# Altium PCB SBM_BMS.PcbDoc (part 1 of 4)
Units mil, origin at the board's own origin, x right, y up, seen from the top; angles counter-clockwise.
Board outline 7537.59 x 2875 mil, 2 copper layers (Top Layer, Bottom Layer), stack 64.961 mil thick; 180 components, 137 nets, 631 pads, 494 vias.
Unrouted connection lines stored in the file: 10.
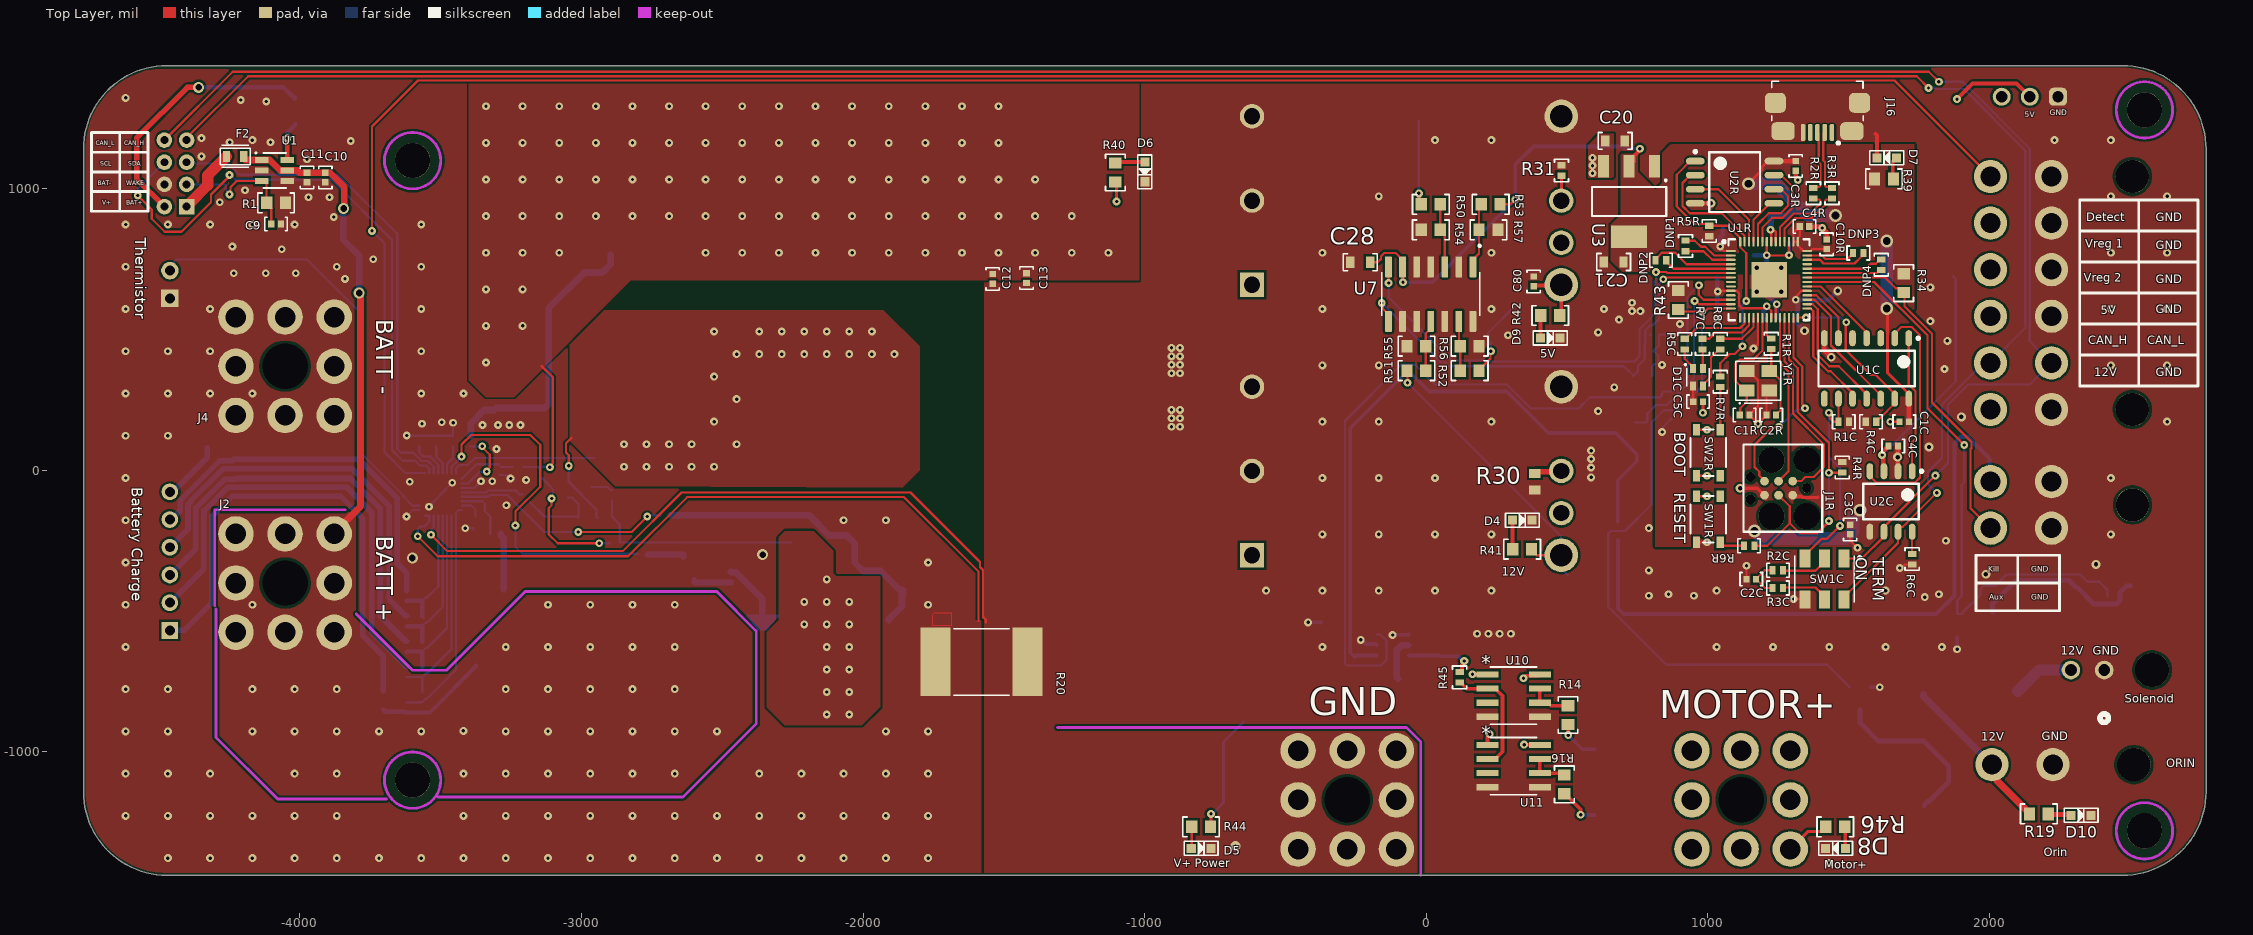
[diagram p0: Top Layer view]
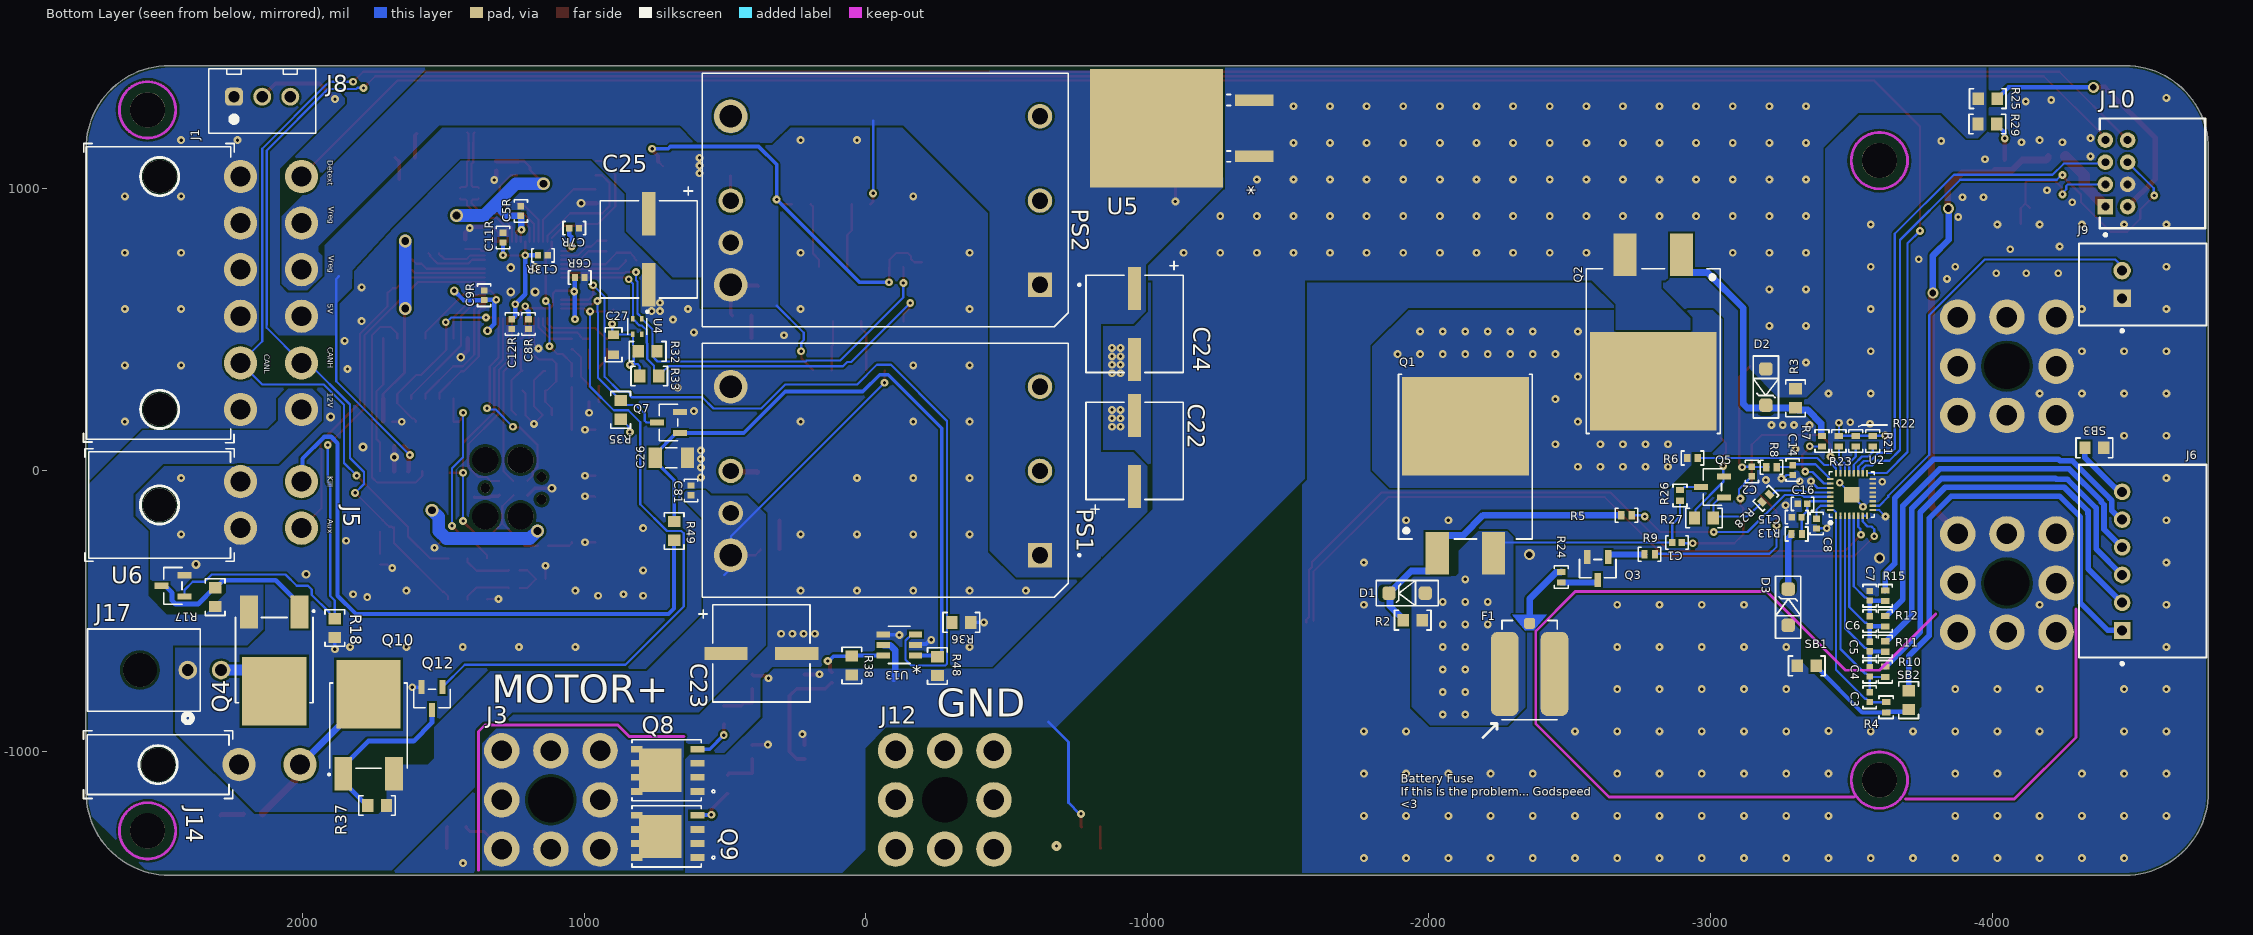
[diagram p1: Bottom Layer view, seen from below]
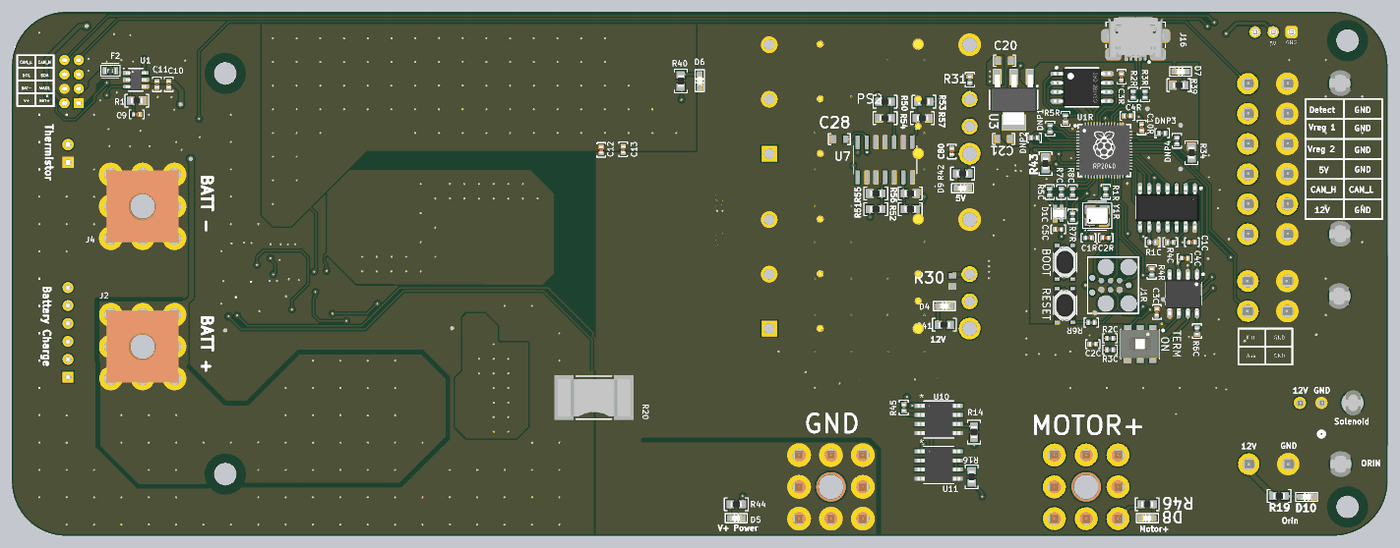
[diagram p4: 3D render of the assembled board from above, using the file's embedded part models]
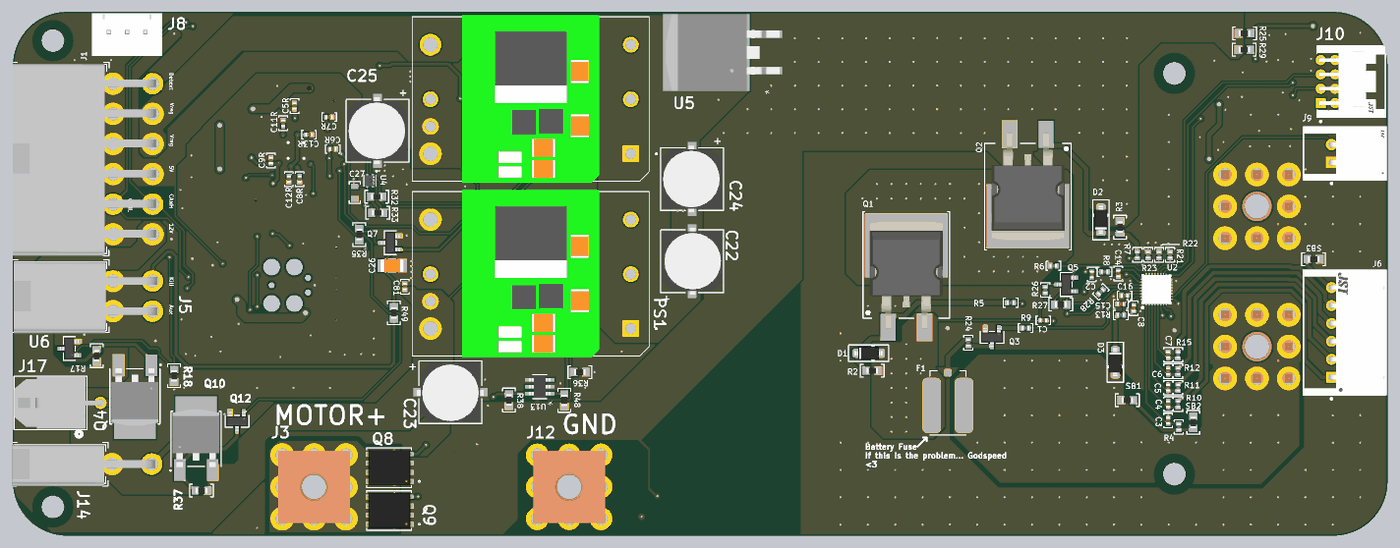
[diagram p5: 3D render of the assembled board from below, using the file's embedded part models]

## Layer stack, top to bottom
Top Solder: solder mask 0.5, Solder Resist, Dk 3.8
Top Layer: signal copper 2.9528
Dielectric: core 59.0551, FR-4, Dk 4.5
Bottom Layer: signal copper 2.9528
Bottom Solder: solder mask 0.5, Solder Resist, Dk 3.8

## Board outline
-4472.5,-1437.5 cw(c-4472.5,-1141.21) -4768.79,-1141.21 -4768.79,1141.21 cw(c-4472.51,1141.21) -4472.5,1437.5 2472.5,1437.5 cw(c2472.51,1141.2) 2768.8,1141.2 2768.8,-1141.2 cw(c2472.5,-1141.2) 2472.5,-1437.5

## Design rules (kind name [scope] priority, off if disabled: settings)
AcuteAngle [All] p1: minimum=6.00000000000000E+0001 checktracksonly=TRUE
BoardOutlineClearance "BoardOutlineClearance JLCPCB" [All] p1: gap=7.87 ignorepadtopadclearanceinfootprint=FALSE
Clearance "Clearance JLCPCB 2oz" [All] p1: gap=7.87 ignorepadtopadclearanceinfootprint=FALSE except(10: Arc-Hole Track-Hole SMDPad-Hole THPad-Hole Via-Hole Fill-Hole Poly-Hole Region-Hole Text-Hole)
DiffPairsRouting [All] p1: maxlimit=10 minlimit=6 mostfreqgap=8 toplayer_minwidth=8 toplayer_maxwidth=15 toplayer_prefwidth=8 bottomlayer_minwidth=8 bottomlayer_maxwidth=15 bottomlayer_prefwidth=8 maxuncoupledlength=500
HoleSize "HoleSize JLCPCB Pad" [IsPad] p1: absolutevalues=TRUE maxlimit=248.03 minlimit=19.68 maxpercent=80.000 minpercent=20.000
HoleSize "HoleSize JLCPCB 2 layer" [All] p2: absolutevalues=TRUE maxlimit=248.03 minlimit=11.81 maxpercent=80.000 minpercent=20.000
HoleToHoleClearance "HoleToHoleClearance JLCPCB" [All] p1: gap=10 allowstackedmicrovias=TRUE
MinimumAnnularRing "MinimumAnnularRing JLCPCB Pad" [IsPad] p1: minimumring=11.81
MinimumAnnularRing "MinimumAnnularRing JLCPCB 2oz" [All] p2: minimumring=7.87
MinimumSolderMaskSliver [All] p1: minsoldermaskwidth=1
PlaneConnect [All] p1: pad.planeconnectstyle=Relief pad.reliefexpansion=20 pad.reliefentries=4 pad.reliefconductorwidth=10 pad.reliefairgap=10 via.planeconnectstyle=Direct via.reliefexpansion=20 via.reliefentries=4 via.reliefconductorwidth=10 via.reliefairgap=10
PolygonConnect [All] p1: connectstyle=Direct reliefconductorwidth=15 reliefentries=4 polygonreliefangle="45 Angle" airgapwidth=10
RoutingVias "RoutingVias JLCPCB" [All] p1: holewidth=15.75 width=31.5 viastyle="Through Hole" minholewidth=11.81 minwidth=15.75 maxholewidth=28 maxwidth=50
SilkToSilkClearance [All] p1: silktosilkclearance=3
SilkToSolderMaskClearance "SilkToSolderMaskClearance JLCPCB" [IsPad] p1: minsilkscreentomaskgap=5.91 clearancetoexposedcopper=TRUE
SolderMaskExpansion "SolderMaskExpansion JLCPCB" [All] p1: expansion=1.97 istentingtop=FALSE
SupplyNets "Schematic Supply Nets_10" [InNet('BAT-')] p1: voltage=0.000
SupplyNets "Schematic Supply Nets_8" [InNet('BAT+')] p2: voltage=0.000
SupplyNets "Schematic Supply Nets_7" [InNet('GND_RP2CAN')] p3: voltage=0.000
SupplyNets "Schematic Supply Nets_6" [InNet('3V3_RP2CAN')] p4: voltage=0.000
SupplyNets "Schematic Supply Nets_5" [InNet('MOTOR_PWR')] p5: voltage=0.000
SupplyNets "Schematic Supply Nets_4" [InNet('V+')] p6: voltage=0.000
SupplyNets "Schematic Supply Nets_2" [InNet('Vreg')] p7: voltage=0.000
SupplyNets "Schematic Supply Nets_1" [InNet('12V')] p8: voltage=0.000
SupplyNets "Schematic Supply Nets" [InNet('5V')] p9: voltage=0.000
Width "Width JLCPCB 2oz" [All] p1: maxlimit=200 minlimit=7.87 preferedwidth=10 minimp=50.000000 maximp=50.000000 favimp=50.000000
23 further rules are at their usual default settings.

## Classes and differential pairs
differential pair class "USB 2.0": USB USB_RP2040
component class U_RP2040_with_CAN: C1C C2C C3C C4C C5C D1C R1C R2C R3C R4C R5C R6C R7C R8C SW1C U1C U2C
component class U_RP2040_C: C1R C2R C3R C4R C5R C6R C7R C8R C9R C10R C11R C12R C13R J1R R1R R2R R3R R4R R5R R6R R7R SW1R SW2R U1R U2R Y1R
component class U_PD_MK2_Power: C20 C21 C22 C23 C24 C25 C80 C81 PS1 PS2 R30 R31 U3 U5
component class U_PD_MK2_Killswitch: C26 Q7 Q8 Q9 R14 R16 R35 R36 R38 R45 R48 R49 U10 U11 U13
component class U_PD_MK2_Circuits: C27 C28 D10 DNP1 DNP2 DNP3 DNP4 Q4 Q10 Q12 R17 R18 R19 R32 R33 R34 R37 R43 R50 R51 R52 R53 R54 R55 R56 R57 U4 U6 U7
component class Poactuator_Connectors: D4 D5 D6 D7 D8 D9 J1 J3 J5 J8 J12 J14 J16 J17 R39 R40 R41 R42 R44 R46
component class BMS: C1 C2 C3 C4 C5 C6 C7 C8 C9 C10 C11 C12 C13 C14 C15 C16 D1 D2 D3 F1 F2 J2 J4 J6 J9 J10 Q1 Q2 Q3 Q5 R1 R2 R3 R4 R5 R6 R7 R8 R9 R10 R11 R12 R13 R15 R20 R21 R22 R23 R24 R25 R26 R27 R28 R29 SB1 SB2 SB3 U1 U2
differential pair USB: +USB_P -USB_N
differential pair USB_RP2040: +USB_RP2040_P -USB_RP2040_N

## Components (designator, comment, footprint, x,y, rotation, side; value= is the part's Value field where it differs from the comment)
C1 "100nF Ceramic 25V" CAPACITOR_0402 -2881.29,-256.01 r0 bottom value=0.1uF
C1C "100nF Ceramic 25V" CAPACITOR_0402 1697.13,173.03 r180 top value=0.1uF
C1R "27pF Ceramic 50V" CAPACITOR_0402 1130.2,196.65 r0 top value=27pF
C2 "100nF Ceramic 25V" CAPACITOR_0402 -3147,-4 r270 bottom value=0.1uF
C2C "4700pF Ceramic 25V" CAPACITOR_0402 1153.82,-386.02 r0 top value=4.7nF
C2R "27pF Ceramic 50V" CAPACITOR_0402 1224.69,196.65 r180 top value=27pF
C3 "100nF Ceramic 25V" CAPACITOR_0402 -3565.69,-805.33 r90 bottom value=0.1uF
C3C "100nF Ceramic 25V" CAPACITOR_0402 1505,-210 r270 top value=0.1uF
C3R "100nF Ceramic 6.3V" CAPACITOR_0402 1311.3,1081.3 r270 top value=0.1uF
C4 "100nF Ceramic 25V" CAPACITOR_0402 -3565.69,-715.33 r90 bottom value=0.1uF
C4C "100nF Ceramic 25V" CAPACITOR_0402 1657.76,86.42 r0 top value=0.1uF
C4R "1uF Ceramic 16V" CAPACITOR_0402 1342.8,865.94 r0 top value=1uF
C5 "100nF Ceramic 25V" CAPACITOR_0402 -3565.69,-625.33 r90 bottom value=0.1uF
C5C "1uF Ceramic 16V" CAPACITOR_0402 964.84,243.9 r0 top value=1uF
C5R "100nF Ceramic 6.3V" CAPACITOR_0402 1224.69,921.06 r90 bottom value=0.1uF
C6 "100nF Ceramic 25V" CAPACITOR_0402 -3565.69,-535.33 r90 bottom value=0.1uF
C6R "100nF Ceramic 6.3V" CAPACITOR_0402 1015,685 r180 bottom value=0.1uF
C7 "100nF Ceramic 25V" CAPACITOR_0402 -3565.69,-445.33 r90 bottom value=0.1uF
C7R "100nF Ceramic 6.3V" CAPACITOR_0402 1035,860 r180 bottom value=0.1uF
C8 "2.2uF Ceramic 35V" CAPACITOR_0402 -3377,-189 r90 bottom value=2.2uF
C8R "100nF Ceramic 6.3V" CAPACITOR_0402 1197.02,519.49 r270 bottom value=0.1uF
C9 "100nF Ceramic 25V" CAPACITOR_0402 -4085,875 r0 top value=0.1uF
C9R "100nF Ceramic 6.3V" CAPACITOR_0402 1354.61,621.85 r90 bottom value=0.1uF
C10 "1uF Ceramic 16V" CAPACITOR_0402 -3910,1040 r270 top value=1uF
C10R "100nF Ceramic 6.3V" CAPACITOR_0402 1421.54,802.95 r90 top value=0.1uF
C11 "100nF Ceramic 25V" CAPACITOR_0402 -3975,1040 r270 top value=0.1uF
C11R "1uF Ceramic 16V" CAPACITOR_0402 1287.68,826.57 r90 bottom value=1uF
C12 "1uF Ceramic 16V" CAPACITOR_0402 -1540,680 r270 top value=1uF
C12R "100nF Ceramic 6.3V" CAPACITOR_0402 1256.18,519.49 r270 bottom value=0.1uF
C13 "100nF Ceramic 25V" CAPACITOR_0402 -1420,682.87 r270 top value=0.1uF
C13R "100nF Ceramic 6.3V" CAPACITOR_0402 1145.94,763.58 r180 bottom value=0.1uF
C14 "1uF Ceramic 16V" CAPACITOR_0402 -3292,1 r270 bottom value=1uF
C15 "100nF Ceramic 25V" CAPACITOR_0402 -3306.29,-166.01 r180 bottom value=0.1uF
C16 "1uF Ceramic 16V" CAPACITOR_0402 -3327,-119 r180 bottom value=1uF
C20 "10uF Ceramic 6.3V" CAPACITOR_0603 670,1170 r0 top
C21 "10uF Ceramic 6.3V" CAPACITOR_0603 665,740 r180 top
C22 "100uF electrolytic 35 V" PCAP_8x5.4-ELECT_NCA -955,69 r90 bottom value=100uF
C23 "22uF electrolytic 35 V" PCAP_8x5.4-ELECT_NCA 370,-650 r180 bottom value=22uF
C24 "100uF electrolytic 35 V" PCAP_8x5.4-ELECT_NCA -955,520 r270 bottom value=100uF
C25 "22uF electrolytic 35 V" PCAP_8x5.4-ELECT_NCA 770,785 r270 bottom value=22uF
C26 "10uF Ceramic 25V" CAPACITOR_1206 690,45 r180 bottom
C27 "100nF Ceramic 6.3V" CAPACITOR_0603 895,446 r270 bottom value=0.1uF
C28 "100nF Ceramic 6.3V" CAPACITOR_0603 -235,739 r180 top value=0.1uF
C80 "CL05A104KA5NNNC" CAPACITOR_0402 381,671 r90 top
C81 "CL05A104KA5NNNC" CAPACITOR_0402 620,-71 r90 bottom
D1 "Zener_Diode_16V_500mW" SOD-123 -1923,-436 r0 bottom
D1C "EAST1616RGBB4" LED_0606_4SMD 964.84,330.51 r270 top
D2 "Zener_Diode_16V_500mW" SOD-123 -3197,296 r270 bottom
D3 "MBR0520LT3G" SOD-123 -3276.29,-486.01 r90 bottom
D4 "IN-S63AT5G" LED_0603 340.71,-177.01 r0 top
D5 "IN-S63AT5G" LED_0603 -800,-1342 r0 top
D6 "IN-S63AT5G" LED_0603 -1000,1060 r270 top
D7 "IN-S63AT5G" LED_0603 1635,1110 r180 top
D8 "IN-S63AT5G" LED_0603 1453,-1342 r180 top
D9 "IN-S63AT5G" LED_0603 440,470 r0 top
D10 "IN-S63AT5G" LED_0603 2325,-1225 r0 top
DNP1 "DNP" RESISTOR_0402 920,797 r270 top
DNP2 "DNP" RESISTOR_0402 833,746 r0 top
DNP3 "DNP" RESISTOR_0402 1534,772 r180 top
DNP4 "DNP" RESISTOR_0402 1615,730 r90 top
F1 "ITV9550L2045MR" ITV9550 -2358,-633 r270 bottom
F2 "Fuse 1A 32V 0603" "2-SMD Fuse 0603" -4230,1115 r180 top
J1 "Mini-Fit Jr R/A" "CONN_MOLEX_MINIFIT JR_12 POS_R/A" 2255,630 r270 bottom
J1R "TagConnect SWD" TC2030-MCP 1350.67,-63.19 r180 top
J2 "Redcube M4 Term 85A" "Redcube M4 Term 85A" -4053,-400 r0 top
J3 "Redcube M4 Term 85A" "Redcube M4 Term 85A" 1117.7,-1170 r180 bottom
J4 "Redcube M4 Term 85A" "Redcube M4 Term 85A" -4053,370 r0 top
J5 "Mini-Fit Jr R/A" "CONN_MOLEX_MINIFIT JR_4 POS_R/A" 2507.4,-122.68 r270 bottom
J6 "S6B-XH-A-1(LF)(SN)" FP-S6B-XH-A-1_LF_SN-MFG -4534.85,-322.21 r270 bottom
J8 "XH2.54 VERT" CONN_JST_XH254_3POS_VERT 2243,1327 r180 bottom
J9 "S2B-XH-A-1(LF)(SN)" FP-S2B-XH-A-1_LF_SN-MFG -4535,660 r270 bottom
J10 "S8B-PHDSS (LF)(SN)" FP-S8B-PHDSS_LF_SN-MFG -4570,1055 r270 bottom
J12 "Redcube M4 Term 85A" "Redcube M4 Term 85A" -281,-1170 r180 bottom
J14 "Mini-Fit Jr R/A" "CONN_MOLEX_MINIFIT JR_2 POS_R/A" 2512.4,-1045 r270 bottom locked
J16 "USB_MICRO R/A" CONN_MINIUSB 1388.82,1305.32 r180 top
J17 "Microfit R/A" "CONN_MOLEX_MICROFIT_2 POS_R/A" 2407.11,-709 r270 bottom
PS1 "I6A4W020A033V-001-R" CONV_I6A4W020A033V-001-R -70,0 r0 bottom
PS2 "I6A4W020A033V-001-R" CONV_I6A4W020A033V-001-R -70,960 r0 bottom
Q1 "MOSFET N-Ch 80V 100A D2PAK" D2PAK -2130,-69 r180 bottom
Q2 "MOSFET N-Ch 80V 100A D2PAK" D2PAK -2797,541 r0 bottom
Q3 "MOSFET N-CH 30V 5.8A SOT-23-3" SOT-23-3 -2600,-349 r0 bottom
Q4 "FDD4141" DPAK_ONS 2100,-675 r0 bottom
Q5 "MOSFET P-CHANNEL 20V 4.7A SOT23" SOT-23-3 -3007,-59 r90 bottom
Q7 "MOSFET N-CH 30V 5.8A SOT-23-3" SOT-23-3 700,170 r90 bottom
Q8 "SIR167DP-T1-GE3" MOSFET_7DP-T1-GE3_VIS 705,-1065 r0 bottom
Q9 "SIR167DP-T1-GE3" MOSFET_7DP-T1-GE3_VIS 705,-1300 r0 bottom
Q10 "FDD4141" DPAK_ONS 1765,-905 r180 bottom
Q12 "AO3404A" SOT-23-3 1540,-810 r0 bottom
R1 "1M" RESISTOR_0603 -4085,950 r0 top
R1C "10k Ohm 1% 1/16W" RESISTOR_0402 1481.97,173.03 r180 top
R1R "1k Ohm 1% 1/16W" RESISTOR_0402 1224.69,449.68 r270 top
R2 "1M" RESISTOR_0603 -1943,-532 r0 bottom
R2C "60.4 Ohm 1% 1/16W" RESISTOR_0402 1248.31,-354.53 r180 top
R2R "27 Ohm 1% 1/16W" RESISTOR_0402 1374.29,984.06 r270 top
R3 "1M" RESISTOR_0603 -3302,256 r270 bottom
R3C "60.4 Ohm 1% 1/16W" RESISTOR_0402 1248.31,-417.52 r180 top
R3R "27 Ohm 1% 1/16W" RESISTOR_0402 1440.3,984.06 r270 top
R4 "100 Ohm 5% 1/16W" RESISTOR_0402 -3624,-841 r270 bottom
R4C "10k Ohm 1% 1/16W" RESISTOR_0402 1579.02,173.03 r0 top
R4R "10k Ohm 1% 1/16W" RESISTOR_0402 1476.65,10.63 r270 top
R5 "1k Ohm 1% 1/16W" RESISTOR_0402 -2702,-159 r180 bottom
R5C "604 Ohm 1% 1/16W" RESISTOR_0402 917.6,448.62 r270 top
R5R "10k Ohm 1% 1/16W" RESISTOR_0402 1004.21,850.2 r90 top
R6 "100 Ohm 5% 1/16W" RESISTOR_0402 -2936.29,43.99 r180 bottom
R6C "10k Ohm 1% 1/16W" RESISTOR_0402 1724.88,-315.16 r270 top
R6R "1k Ohm 1% 1/16W" RESISTOR_0402 1145.94,-267.91 r0 top
R7 "1k Ohm 1% 1/16W" RESISTOR_0402 -3396.29,103.99 r270 bottom
R7C "200 Ohm 1% 1/16W" RESISTOR_0402 980.59,448.62 r270 top
R7R "1k Ohm 1% 1/16W" RESISTOR_0402 1043.58,314.76 r90 top
R8 "10k Ohm 1% 1/16W" RESISTOR_0402 -3217,11 r180 bottom
R8C "200 Ohm 1% 1/16W" RESISTOR_0402 1043.58,448.62 r270 top
R9 "100 Ohm 5% 1/16W" RESISTOR_0402 -2784,-298 r0 bottom
R10 "100 Ohm 5% 1/16W" RESISTOR_0402 -3620.69,-715.33 r90 bottom
R11 "100 Ohm 5% 1/16W" RESISTOR_0402 -3620.69,-625.33 r90 bottom
R12 "100 Ohm 5% 1/16W" RESISTOR_0402 -3620.69,-535.33 r90 bottom
R13 "100 Ohm 5% 1/16W" RESISTOR_0402 -3306.29,-226.01 r0 bottom
R14 "27 Ohm 5% 1/8W" RESISTOR_0603 503,-869 r270 top
R15 "100 Ohm 5% 1/16W" RESISTOR_0402 -3620.69,-445.33 r90 bottom
R16 "27 Ohm 5% 1/8W" RESISTOR_0603 490,-1115 r270 top
R17 "10k Ohm 5% 1/10W" RESISTOR_0603 2310,-450 r90 bottom
R18 "1k Ohm 5% 1/8W" RESISTOR_0603 1885,-560 r270 bottom
R19 "2.1k Ohm 5% 1/8W" RESISTOR_0603 2175,-1220 r0 top
R20 "1m Ohm 5% 8W" RES_CSS2H-3920 -1580,-680 r0 top
R21 "20k Ohm 1% 1/16W" RESISTOR_0402 -3576.29,103.99 r90 bottom
R22 "20k Ohm 1% 1/16W" RESISTOR_0402 -3516.29,103.99 r90 bottom
R23 "20k Ohm 1% 1/16W" RESISTOR_0402 -3456.29,103.99 r90 bottom
R24 "100 Ohm 5% 1/16W" RESISTOR_0402 -2470,-379 r270 bottom
R25 "10k Ohm 5% 1/10W" RESISTOR_0603 -3985,1320 r180 bottom
R26 "100 Ohm 5% 1/16W" RESISTOR_0402 -2892,-89 r90 bottom
R27 "1M" RESISTOR_0603 -2977,-169 r0 bottom
R28 "10k Ohm 1% 1/16W" RESISTOR_0402 -3197,-99 r135 bottom
R29 "1k Ohm 5% 1/8W" RESISTOR_0603 -3983.5,1230 r180 bottom
R30 "1.82k" RESC1608X55X25ML10T15 385,-40 r90 top
R31 "RES 8.56K OHM 1% 1/16W 0402" RESISTOR_0402 480,1065 r90 top
R32 "4.7k Ohm 5% 1/10W" RESISTOR_0603 774,423 r180 bottom
R33 "4.7k Ohm 5% 1/10W" RESISTOR_0603 768.5,335 r180 bottom
R34 "1k Ohm 5% 1/8W" RESISTOR_0603 1695,665 r270 top
R35 "100k Ohm 0.5% 1/10W" RESISTOR_0603 870,215 r90 bottom
R36 "10k Ohm 5% 1/10W" RESISTOR_0603 -340,-540 r0 bottom
R37 "10k Ohm 5% 1/10W" RESISTOR_0603 1735,-1190 r0 bottom
R38 "100k Ohm 5% 1/8W" RESISTOR_0603 49,-693 r90 bottom
R39 "5.1K" RESISTOR_0603 1625,1035 r0 top
R40 "3.9k Ohm 5% 1/10W" RESISTOR_0603 -1104.29,1057.99 r90 top
R41 "4.7k Ohm 5% 1/10W" RESISTOR_0603 340,-280 r180 top
R42 "1k Ohm 5% 1/8W" RESISTOR_0603 440,550 r180 top
R43 "10k Ohm 5% 1/10W" RESISTOR_0603 895,605 r270 top
R44 "3.9k Ohm 5% 1/10W" RESISTOR_0603 -800,-1266 r180 top
R45 "1k Ohm 1% 1/16W" RESISTOR_0402 118,-735 r90 top
R46 "3.9k Ohm 5% 1/10W" RESISTOR_0603 1452,-1266 r0 top
R48 "100k Ohm 0.5% 1/10W" RESISTOR_0603 -255,-695 r90 bottom
R49 "1k Ohm 5% 1/8W" RESISTOR_0603 680,-215 r270 bottom
R50 "10k Ohm 0.5% 1/10W" RESISTOR_0603 15.75,944.88 r0 top
R51 "10k Ohm 0.5% 1/10W" RESISTOR_0603 -35.43,354.33 r0 top
R52 "10k Ohm 0.5% 1/10W" RESISTOR_0603 153.54,354.33 r180 top
R53 "10k Ohm 0.5% 1/10W" RESISTOR_0603 228.35,944.88 r180 top
R54 "1k Ohm 5% 1/10W" RESISTOR_0603 15.75,854.33 r180 top
R55 "1k Ohm 5% 1/10W" RESISTOR_0603 -35.43,440.94 r180 top
R56 "1k Ohm 5% 1/10W" RESISTOR_0603 153.54,440.94 r0 top
R57 "10k Ohm 0.5% 1/10W" RESISTOR_0603 220.47,854.33 r0 top
SB1 "0 Ohm Jumper No Fit" RESISTOR_0603 -3342,-694 r180 bottom
SB2 "0 Ohm Jumper No Fit" RESISTOR_0603 -3704,-816 r90 bottom
SB3 "0 Ohm Jumper No Fit" RESISTOR_0603 -4363.5,80 r0 bottom
SW1C "Switch DPDT" CAS-220TA 1413.66,-386.02 r180 top
SW1R "434123025826" SMD_434123025826 1001.26,-173.43 r270 top
SW2R "434123025826" SMD_434123025826 1001.26,62.8 r270 top
U1 "Analog Switch SPST-NO" TSOT-23_S6 -4090,1065 r0 top
U1C "MCP2517FD" SOIC-14 1563.27,362.01 r270 top
U1R "RP2040" "QFN-56 RP2040" 1216.81,676.97 r0 top locked
U2 "Battery Managment IC" VQFN-32 -3501.29,-86.01 r90 bottom
U2C "CAN Transceiver" SOIC-8 1649.88,-110.43 r270 top
U2R "W25Q128JVSIQ" "SOIC-8 W25QxJV" 1094.71,1023.43 r0 top
U3 "LM1117IMPX-3.3/NOPB" SOT-223-4 720,955 r270 top
U4 "SHT14 SENSOR HUMID/TEMP" XDCR_SHT41-AD1B-R2 810.75,510.44 r270 bottom
U5 "MBRB2545CT" D2PAK_VIS -1033,1215 r90 bottom
U6 "AO3404A" SOT-23-3 2460,-410 r90 bottom
U7 "MCP3428-E/SL" SOIC127P600X175-14N 15.35,625.98 r270 top
U10 "TC4432EOA713" SOIC8-N_MC_MCH 310,-800 r0 top
U11 "TC4432EOA713" SOIC8-N_MC_MCH 310,-1050 r0 top
U13 "DG448DV-T1-E3" TSOP6_DG_VIS-M -120,-620 r0 bottom
Y1R "CRYSTAL 12.0000MHZ 18PF SMD" "4-SMD, NO LEAD CRYSTAL 3.2x2.5mm" 1138.07,283.27 r0 top

## Footprints (in the part's own frame and the unit in brackets; to place one, negate y for a bottom-side part, rotate by r counter-clockwise, add the part's x,y. Pads: shape width x height; smd on the part's side, far side on the other; paste and mask are expansions set on the pad)
"2-SMD Fuse 0603" [mm] "0603 Fuse Footprint"
  rect 0.65x1 smd paste+0 mask+0: 1(-0.775,0) 2(0.775,0)
  silkscreen extent -1.35,-1 1.35,1, body extent -0.8,-0.4 0.8,0.4, height 0.64
"4-SMD, NO LEAD CRYSTAL 3.2x2.5mm" [mm]
  rrect0% 1.4x1.1 smd: 1(0,0) 2(2.032,0) 3(2.032,1.778) 4(0,1.778)
  silkscreen extent -1.02,-1.2 3.05,2.92, body extent -0.58,-0.36 2.62,2.14, height 0.82
CAPACITOR_0402 [mm]
  rect 0.56x0.6 smd: 1(-0.435,0) 2(0.435,0)
  silkscreen extent -1.02,-0.6 1.02,0.6, body extent -0.5,-0.28 0.5,0.27, height 0.51
CAPACITOR_0603 [mil] "CAPACITOR 0603"
  rect 30x40 smd: 1(-35,0) 2(35,0)
  silkscreen extent -60,-30 60,30, body extent -31,-16 31,16, height 31
CAPACITOR_1206 [mm]
  rect 1.2x1.82 smd: 1(-1.46,0) 2(1.46,0)
  silkscreen extent -0.54,-0.9 0.54,0.9, body extent -1.6,-0.9 1.6,0.9, height 1.61
CAS-220TA [mm] "SWITCH SLIDE DPDT 100MA 6V"
  rrect0% 1x1.6 smd: 1(-1.75,-1.85) 2(0,-1.85) 3(1.75,-1.85) 4(-1.75,1.85) 5(0,1.85) 6(1.75,1.85)
  silkscreen extent -3.3,-2.1 2.7,2.1, body extent -2.7,-2.1 2.7,2.1, height 2.51
CONN_JST_XH254_3POS_VERT [mm] "JST XH 2.54mm Pitch 3 Pos Vertical"
  rrect50% 1.62x1.62 hole 1.02: 1(0,0)
  round 1.62 hole 1.02: 2(2.54,0) 3(5.08,0)
  silkscreen extent -2.29,-3.3 7.37,2.54, body extent -2.34,-3.35 7.42,2.49, height 7.21
CONN_MINIUSB [mm] "USB2.0 Micro-B Receptacle SMD R/A"
  rrect50% 0.4x1.5 smd: 1(-1.3,2.675) 2(-0.65,2.675) 3(0,2.675) 4(0.65,2.675) 5(1.3,2.675)
  rrect50% 2.1x1.6 smd: 6(-3.1,2.55) 7(3.1,2.55)
  rrect50% 1.9x1.8 smd: 8(3.8,0) 9(-3.8,0)
  silkscreen extent -4.14,-1.96 4.11,3.75, body extent -3.96,-2.67 3.96,2.99, height 2.72
"CONN_MOLEX_MICROFIT_2 POS_R/A" [mil] "0430450200"
  round 66 hole 42 paste-99999 mask+0: 1(0,0) 2(0,118.11)
  round 120 / inner round 60 / far side round 120 hole 120 unplated paste-99999 mask-60: 3(0,-170.08)
  silkscreen extent -146,-356 186,44, body extent -141,-355 141,127, height 343
"CONN_MOLEX_MINIFIT JR_2 POS_R/A" [mm] "Molex Minifit Jr 5569 2 Pos R/A"
  round 3 hole 1.8: 1(0,7.3) 2(0,12.8)
  round 3 hole 3 unplated mask+0: ""(0,0)
  silkscreen extent -3.05,-6.73 3.05,6.73, body extent -2.7,-6.6 3.1,13.34, height 11.4
"CONN_MOLEX_MINIFIT JR_4 POS_R/A" [mm] "Molex Minifit Jr 5569 4 Pos R/A"
  round 3 hole 1.8: 1(2.1,7.3) 2(-2.1,7.3) 3(2.1,12.8) 4(-2.1,12.8)
  round 3 hole 3 unplated mask+0: ""(0,0)
  silkscreen extent -5.08,-6.73 5.08,6.73, body extent -4.8,-6.5 5.2,13.44, height 11.4
"CONN_MOLEX_MINIFIT JR_12 POS_R/A" [mm] "Molex Minifit Jr 5569 12 Pos R/A"
  round 3 hole 1.801: 1(10.5,0.9) 2(6.3,0.9) 3(2.1,0.9) 4(-2.1,0.9) 7(10.5,6.4) 8(6.3,6.4) 9(2.1,6.4) 10(-2.1,6.4)
  round 3 hole 1.8: 5(-6.3,0.9) 6(-10.5,0.9) 11(-6.3,6.4) 12(-10.5,6.4)
  round 3 hole 3 unplated mask+0: ""(-10.5,-6.4) ""(10.5,-6.4)
  silkscreen extent -13.48,-13.27 13.51,0.33, body extent -13.27,-13.08 13.52,6.85, height 11.01
CONV_I6A4W020A033V-001-R [mm]
  rect 2.205x2.205 hole 1.47: 1(-13.95,7.65)
  round 2.205 hole 1.47: 2(-13.95,0.05) 3(-13.95,-7.55) 6(13.95,0.05) 7(13.95,3.85)
  round 3.03 hole 2.02: 4(13.95,-7.55) 8(13.95,7.65)
  silkscreen extent -17.6,-11.45 16.5,11.45, body extent -9.53,-11.68 9.53,11.68, height 9.65
D2PAK [mil] "D2PAK (TO-263-3)"
  rect 82x150 smd: 1(-100,-225) 2(100,-225)
  rect 450x350 smd: 3(0,225)
  silkscreen extent -238,-175 238,410, body extent -201,-234 201,357, height 178
D2PAK_VIS [mil]
  rect 41x138 smd paste+0 mask+0: 1(-100,-347) 3(100,-347)
  rect 422x474 smd paste+0 mask+0: 2(0,0)
  silkscreen extent -120,-264 119,-250, body extent -210,-402 210,223, height 190
DPAK_ONS [mil]
  rect 63x118 smd: 1(-90,-172.5) 2(90,-172.5)
  rect 228x244 smd: 3(0,109.5)
  silkscreen extent -142,-177 138,150, body extent -129,-156 129,160, height 94
FP-S2B-XH-A-1_LF_SN-MFG [mm]
  rect 1.575x1.575 hole 0.9 paste-2539.97 mask+0: 1(1.25,-1.85)
  round 1.575 hole 0.9 paste-2539.97 mask+0: 2(-1.25,-1.85)
  silkscreen extent -3.7,-5.75 4.3,5.75, body extent -3.7,-5.75 3.7,5.75, height 5.99
FP-S6B-XH-A-1_LF_SN-MFG [mm]
  rect 1.506x1.506 hole 0.9 paste-2539.97 mask+0: 1(6.25,-1.85)
  round 1.506 hole 0.9 paste-2539.97 mask+0: 2(3.75,-1.85) 3(1.25,-1.85) 4(-1.25,-1.85) 5(-3.75,-1.85) 6(-6.25,-1.85)
  silkscreen extent -8.7,-5.75 9.37,5.75, body extent -8.7,-5.75 8.7,5.75, height 6.1
FP-S8B-PHDSS_LF_SN-MFG [mm]
  rect 1.397x1.397 hole 0.7 paste-2539.97 mask+0: 1(3,-4.25)
  round 1.403 hole 0.7 paste-2539.97 mask+0: 2(3,-2.25) 3(1,-4.25) 4(1,-2.25) 5(-1,-4.25) 6(-1,-2.25) 7(-3,-4.25) 8(-3,-2.25)
  silkscreen extent -4.95,-4.75 5.67,4.75, body extent -4.95,-4.75 4.95,4.75, height 5
ITV9550 [mm] "Littlefuse ITV9550"
  rrect50% 7.6x2.5 smd: 1(2.285,-2.25) 2(2.285,2.25)
  rrect50% 1x1 smd: 3(-2.285,0)
  Top Layer region: -3.042,0.381 -3.049,-0.381 -1.641,-0.381 -1.641,0.369 -2.339,0.375
  Top Layer region: -1.635,-0.375 -1.641,-0.381 -3.049,-0.381 -3.049,-1.536 -3.035,-1.55
  Top Layer region: -1.641,0.369 -3.042,0.375 -3.035,1.55
  silkscreen extent -2.54,-2.5 6.4,2.5
LED_0603 [mil] "LED 0603"
  rect 32x32 smd: 1(-35,0) 2(35,0)
  silkscreen extent -60,-25 60,25, body extent -31,-16 31,16, height 28
LED_0606_4SMD [mm]
  rrect0% 0.8x0.55 smd: 1(-0.8,-0.45) 2(-0.8,0.45) 3(0.8,0.45) 4(0.8,-0.45)
  silkscreen extent -1.22,-1.22 0.8,1.02, body extent -0.8,-0.8 0.8,0.8, height 0.35
MOSFET_7DP-T1-GE3_VIS [mil]
  rect 50x24 smd: 1(-107.5,75) 2(-107.5,25) 3(-107.5,-25) 4(-107.5,-75)
  rect 150x154 smd: D(24.5,0)
  rect 40x24 smd: D(107.5,-75) D(107.5,-25) D(107.5,25) D(107.5,75)
  Top Layer region: 1.75,77 1.75,77 1.75,77 1.75,77 1.75,77 1.75,77 1.75,77 1.75,77
  Top Layer region: 1.75,-77 1.75,-77 1.75,-77 1.75,-77 1.75,-77 1.75,-77 1.75,-77 1.75,-77
  silkscreen extent -169,-108 125,108, body extent -121,-101 121,101, height 41
PCAP_8x5.4-ELECT_NCA [mil]
  rect 154x47 smd paste+0 mask+0: 1(-126,0) 2(126,0)
  silkscreen extent -222,-172 172,172, body extent -183,-167 183,160, height 219
"QFN-56 RP2040" [mm] "QFN, 56-Leads, Body 7.00x7.00mm, Pitch 0.40mm, Thermal Pad 3.10x3.10mm, IPC Medium Density"
  oval 0.875x0.2 smd: 1(-3.437,2.6) 2(-3.437,2.2) 3(-3.437,1.8) 4(-3.437,1.4) 5(-3.437,1) 6(-3.437,0.6) 7(-3.437,0.2) 8(-3.437,-0.2) 9(-3.437,-0.6) 10(-3.437,-1) 11(-3.437,-1.4) 12(-3.437,-1.8) 13(-3.437,-2.2) 14(-3.437,-2.6) 29(3.437,-2.6) 30(3.437,-2.2) 31(3.437,-1.8) 32(3.437,-1.4) 33(3.437,-1) 34(3.437,-0.6) 35(3.437,-0.2) 36(3.437,0.2) 37(3.437,0.6) 38(3.437,1) 39(3.437,1.4) 40(3.437,1.8) 41(3.437,2.2) 42(3.437,2.6)
  oval 0.2x0.875 smd: 15(-2.6,-3.437) 16(-2.2,-3.437) 17(-1.8,-3.437) 18(-1.4,-3.437) 19(-1,-3.437) 20(-0.6,-3.437) 21(-0.2,-3.437) 22(0.2,-3.437) 23(0.6,-3.437) 24(1,-3.437) 25(1.4,-3.437) 26(1.8,-3.437) 27(2.2,-3.437) 28(2.6,-3.437) 43(2.6,3.437) 44(2.2,3.437) 45(1.8,3.437) 46(1.4,3.437) 47(1,3.437) 48(0.6,3.437) 49(0.2,3.437) 50(-0.2,3.437) 51(-0.6,3.437) 52(-1,3.437) 53(-1.4,3.437) 54(-1.8,3.437) 55(-2.2,3.437) 56(-2.6,3.437)
  rect 3.2x3.2 smd: 57(0,0)
  silkscreen extent -4.19,-3.65 3.65,3.65, body extent -3.52,-3.52 3.52,3.52, height 0.85
"Redcube M4 Term 85A" [mm]
  round 3.2 hole 1.85: 1(-4.435,-4.435) 1(-4.435,0) 1(-4.435,4.435) 1(0,-4.435) 1(0,4.435) 1(4.435,-4.435) 1(4.435,0) 1(4.435,4.435)
  round 3.2 hole 4.1 unplated: 8(0,0)
  body extent -5,-5 5,5, height 3
RES_CSS2H-3920 [mm] "Current Sense Resistor 1mOhm 8W"
  rect 2.7x6.2 smd paste+0 mask+0: 1(-4.15,0) 2(4.15,0)
  silkscreen extent -2.5,-3 2.5,3, body extent -5,-2.6 5.04,2.6, height 1
RESC1608X55X25ML10T15 [mm] "Chip Resistor, 2-Leads, Body 1.60x0.80mm, IPC Low Density"
  rect 0.8x1 smd: 1(-0.75,0) 2(0.75,0)
  body extent -0.85,-0.45 0.85,0.45, height 0.55
RESISTOR_0402 [mm] "Resistor 0402"
  rect 0.55x0.75 smd: 1(-0.475,0) 2(0.475,0)
  silkscreen extent -1.02,-0.64 1.02,0.64, body extent -0.5,-0.25 0.5,0.25, height 0.25
RESISTOR_0603 [mil] "Resistor 0603"
  rect 40x45 smd: 1(-33.5,0) 2(33.5,0)
  silkscreen extent -65,-35 65,35, body extent -31,-16 31,16, height 16
SMD_434123025826 [mm]
  rect 1.05x0.65 smd: A1(-2.075,1.075) A2(2.075,1.075) B1(-2.075,-1.075) B2(2.075,-1.075)
  silkscreen extent -2.1,-1.6 2.1,1.6, body extent -2.3,-1.6 2.3,1.6, height 2.5
SOD-123 [mm] "Schottky Diode SOD-123"
  rrect50% 1.2x1.22 smd: 1(-1.635,0) 2(1.635,0)
  silkscreen extent -2.79,-1.14 2.79,1.14, body extent -1.95,-0.9 1.95,0.9, height 1.18
SOIC8-N_MC_MCH [mil]
  rect 78x22 smd paste+0 mask+0: 1(-93,75) 2(-93,25) 3(-93,-25) 4(-93,-75) 5(93,-75) 6(93,-25) 7(93,25) 8(93,75)
  silkscreen extent -82,-102 82,102, body extent -118,-96 118,96, height 69
SOIC127P600X175-14N [mm]
  rrect25% 1.9x0.6 smd: 1(-2.455,3.81) 2(-2.455,2.54) 3(-2.455,1.27) 4(-2.455,0) 5(-2.455,-1.27) 6(-2.455,-2.54) 7(-2.455,-3.81) 8(2.455,-3.81) 9(2.455,-2.54) 10(2.455,-1.27) 11(2.455,0) 12(2.455,1.27) 13(2.455,2.54) 14(2.455,3.81)
  silkscreen extent -4.45,-4.43 1.95,4.51
SOIC-8 [mm] "SOIC, 8-Leads, Body 4.90x3.90mm, Pitch 1.27mm, IPC Medium Density"
  oval 1.45x0.6 smd: 1(-2.725,1.905) 2(-2.725,0.635) 3(-2.725,-0.635) 4(-2.725,-1.905) 5(2.725,-1.905) 6(2.725,-0.635) 7(2.725,0.635) 8(2.725,1.905)
  silkscreen extent -2.85,-2.5 1.6,2.88, body extent -3,-2.5 3,2.5, height 1.75
"SOIC-8 W25QxJV" [mm] "SOIC, 8-Leads, Body 5.28x5.28mm, Pitch 1.27mm, IPC Medium Density"
  oval 1.7x0.6 smd: 1(-3.55,1.905) 2(-3.55,0.635) 3(-3.55,-0.635) 4(-3.55,-1.905) 5(3.55,-1.905) 6(3.55,-0.635) 7(3.55,0.635) 8(3.55,1.905)
  silkscreen extent -3.67,-2.7 2.3,2.88, body extent -3.95,-2.62 3.95,2.62, height 1.95
SOIC-14 [mm] "SOIC, 14-Leads, Body 8.65x3.90mm, Pitch 1.27mm, IPC Medium Density"
  oval 1.45x0.6 smd: 1(-2.725,3.81) 2(-2.725,2.54) 3(-2.725,1.27) 4(-2.725,0) 5(-2.725,-1.27) 6(-2.725,-2.54) 7(-2.725,-3.81) 8(2.725,-3.81) 9(2.725,-2.54) 10(2.725,-1.27) 11(2.725,0) 12(2.725,1.27) 13(2.725,2.54) 14(2.725,3.81)
  silkscreen extent -2.85,-4.35 1.6,4.79, body extent -3,-4.4 3,4.4, height 1.7
SOT-23-3 [mil]
  rect 22x50 smd paste+0 mask+4: 1(-37.5,-41) 2(37.5,-41) 3(0,41)
  silkscreen extent -65,-32 65,32, body extent -60,-52 60,52, height 44
SOT-223-4 [mm]
  rect 2.05x1 smd paste+0 mask+0.102: 1(-3.175,2.3) 2(-3.175,0) 3(-3.175,-2.3)
  rect 2.05x3.25 smd paste+0 mask+0.102: 4(3.175,0)
  silkscreen extent -1.96,-3.35 1.3,3.35, body extent -3.5,-3.25 3.5,3.25, height 1.68
TC2030-MCP [mil]
  round 31 smd: 1(50,-25) 2(50,25) 3(100,-25) 4(100,25) 5(150,-25) 6(150,25)
  round 34 hole 35 unplated: A(0,0) B(200,40) C(200,-40)
  round 92 hole 93 unplated: D(0,-100) E(125,-100) F(0,100) G(125,100)
  silkscreen extent -55,-155 225,155
TSOP6_DG_VIS-M [mil]
  rect 47x20 smd paste+0 mask+0: 1(-57,37.4) 2(-57,0) 3(-57,-37.4) 4(57,-37.4) 5(57,0) 6(57,37.4)
  silkscreen extent -38,-66 38,66, body extent -59,-61 59,61, height 43
TSOT-23_S6 [mil]
  rect 48x20 smd: 1(-45,37.4) 2(-45,0) 3(-45,-37.4) 4(45,-37.4) 5(45,0) 6(45,37.4)
  silkscreen extent -69,-62 40,65, body extent -55,-57 55,57, height 39
VQFN-32 [mm] "32 pin VQFN package, 4x4mm, 0.4mm pitch"
  rrect50% 0.6x0.2 smd: 1(-1.915,1.4) 2(-1.915,1) 3(-1.915,0.6) 4(-1.915,0.2) 5(-1.915,-0.2) 6(-1.915,-0.6) 7(-1.915,-1) 8(-1.915,-1.4) 17(1.915,-1.4) 18(1.915,-1) 19(1.915,-0.6) 20(1.915,-0.2) 21(1.915,0.2) 22(1.915,0.6) 23(1.915,1) 24(1.915,1.4)
  rrect50% 0.2x0.6 smd: 9(-1.4,-1.915) 10(-1,-1.915) 11(-0.6,-1.915) 12(-0.2,-1.915) 13(0.2,-1.915) 14(0.6,-1.915) 15(1,-1.915) 16(1.4,-1.915) 25(1.4,1.915) 26(1,1.915) 27(0.6,1.915) 28(0.2,1.915) 29(-0.2,1.915) 30(-0.6,1.915) 31(-1,1.915) 32(-1.4,1.915)
  rect 1.4x1.4 smd: 33(0,0)
  silkscreen extent -2.67,-2.03 2.05,2.03, body extent -2.01,-2.01 2.01,2.01, height 0.86
XDCR_SHT41-AD1B-R2 [mm] "Sensirion AG SHT14 Sensor Humidity/Temp"
  rect 0.5x0.3 smd: 1(-0.7,0.4) 2(-0.7,-0.4) 3(0.7,-0.4) 4(0.7,0.4)
  silkscreen extent -1.45,-0.87 0.75,1.01, body extent -0.75,-0.75 0.75,0.75, height 0.54

## Part data
C1 C1C C2 C3 C3C C3R C4 C4C C5 C5R C6 C6R C7 C7R C8R C9 C9R C10R C11 C12R C13 C13R C15: library part CAPACITOR_0.1uF_0402, "Cap 100nF 25V +/-10% / Ceramic 0402", Supplier Part Number 1=478-7868-1-ND, Tolerance="+/- 10%", Voltage=25V, Made By="Robert Pafford", Supplier 1=Digi-Key
C1R C2R: library part CAPACITOR_0.000027uF_0402, "Cap 27pF 50V +/-5% / Ceramic 0402", Supplier Part Number 1=445-5589-1-ND, Tolerance="+/- 5%", Voltage=50V, Made By="Robert Pafford", Supplier 1=Digi-Key
C2C: library part CAPACITOR_0.0047uF_0402, "4700 pF +/-10% 25V Ceramic Capacitor X7R 0402", Supplier Part Number 1=478-6195-1-ND, Tolerance="+/- 10%", Voltage=25V, Made By="Robert Pafford", Supplier 1=Digi-Key
C4R C5C C10 C11R C12 C14 C16: library part CAPACITOR_1uF_0402, "Cap 1uF 16V +/-10% / Ceramic 0402", Supplier Part Number 1=478-0402YD105KAT4ADKR-ND, Tolerance="+/- 10%", Voltage=16V, Made By="Robert Pafford", Supplier 1=Digi-Key
C8: library part CAPACITOR_2.2uF_0402, "Cap 2.2uF 35V +/-10% / Ceramic 0402", Supplier Part Number 1=445-9028-1-ND, Tolerance="+/- 10%", Voltage=35V, Made By="Flip B", Supplier 1=Digi-Key
C20 C21: library part CAPACITOR_10uF_0603, "Cap 10uF 6.3V +/-20% / Ceramic 0603", Supplier Part Number 1=1276-1119-1-ND, Tolerance="+/- 20%", Value (uF)="10 uF", Voltage=6.3V, ComponentLink1Description=Digikey, ComponentLink1URL=https://www.digikey.com/en/products/detail/samsung-electro-mechanics/CL10A106MQ8NNNC/3886777, Made By="Flip B", Supplier 1=Digi-Key
C22 C24: library part "CAP ALUM 100UF 20% 35V SMD", "100 µF 35 V Aluminum Electrolytic Capacitors Radial, Can - SMD 1000 Hrs", Manufacturer_Part_Number=UCB1V0R1MCL1GS, Mfr_Name=Nichicon, Supplier Part Number 1=667-EEE-1VA101XP, Copyright="Copyright (C) 2022 Ultra Librarian. All rights reserved.", Made By="Tyson Nguyen", RefDes=RefDes, Supplier 1=Mouser, Type=DEV
C23 C25: library part "CAP ALUM 22UF 20% 35V SMD", "22 µF 35 V Aluminum Electrolytic Capacitors Radial, Can - SMD 1000 Hrs", Supplier Part Number 1=PCE3952DKR-ND, Voltage=35V, Made By="Robert Pafford", Supplier 1=Digi-Key
C26: library part CAPACITOR_10uF_1206, "Cap 10uF 25V +/-10% / Ceramic 1206", Supplier Part Number 1=1276-1804-6-ND, Tolerance="+/- 10%", Value (uF)="10 uF", Voltage=25V, Made By="Robert Pafford", Supplier 1=Digi-Key
C27 C28: library part CAPACITOR_0.1uF_0603, "Cap 100nF 6.3V +/-10% / Ceramic 0603", Supplier Part Number 1=399-15351-1-ND, Tolerance="+/- 10%", Voltage=6.3V, ComponentLink1Description=Datsheet, ComponentLink1URL=https://www.mouser.com/datasheet/2/212/KEM_C1002_X7R_SMD-1102033.pdf, Made By="Flip B", Supplier 1=Digi-Key
C80: library part "CAP CER 0.1UF 25V X5R 0402", "0.1 µF ±10% 25V Ceramic Capacitor X5R 0402 (1005 Metric)", Capacitance=0.1uF, Rated Voltage=25V, Tolerance="+/- 10%", ComponentLink1Description="Data Sheet", ComponentLink1URL=https://mm.digikey.com/Volume0/opasdata/d220001/medias/docus/503/CL05A104KA5NNNC.pdf, Name="Zach Ramsey", Supplier 1=Avnet, Supplier Part Number 1=CL05A104KA5NNNC
C81: library part "CAP CER 0.1UF 25V X5R 0402", "0.1 µF ±10% 25V Ceramic Capacitor X5R 0402 (1005 Metric)", Capacitance=0.1uF, Rated Voltage=25V, Supplier Part Number 1=1276-1043-1-ND, Tolerance="+/- 10%", ComponentLink1Description="Data Sheet", ComponentLink1URL=https://mm.digikey.com/Volume0/opasdata/d220001/medias/docus/503/CL05A104KA5NNNC.pdf, Name="Zach Ramsey", Supplier 1=Digikey
D1 D2: "Zener Diode", Package=SOD-123, Power=500mW, Supplier Part Number 1=3757-MMSZ5246A_R1_00001CT-ND, Voltage - Zener=16V, ComponentLink1Description=Datasheet, ComponentLink1URL=https://www.panjit.com.tw/upload/datasheet/MMSZ5229A_SERIES.pdf, Made By="Flip B", Supplier 1=Digi-Key
D1C: library part LED_RGB_4SMD, "LED RGB CLEAR 4SMD", Blue Forward Current=5mA, Blue Forward Voltage=2.8V, Color=RGB, Package=4-SMD, Red Forward Voltage=1.8V, Supplier Part Number 1=1080-1552-1-ND, ComponentLink1Description=Datasheet, ComponentLink1URL=https://everlightamericas.com/index.php?controller=attachment&id_attachment=3220, Green Forward Current=5mA, Green Forward Voltage=2.8V, Made By="Robert Pafford", Red Forward Current=5mA, Supplier 1=Digi-Key
D3: library part SCHOTTKY_20V_500mA, "Schottky Diode, 20V reverse breakdown, 500mA, Vf = 0.385V", Forward Current=500mA, Forward Voltage=0.385V, Package=SOD-123, Supplier Part Number 1=MBR0520LT3GOSCT-ND, ComponentLink1Description=Datasheet, ComponentLink1URL=https://www.onsemi.com/pdf/datasheet/mbr0520lt1-d.pdf, Made By="Flip B", Supplier 1=Digi-Key
D4 D5 D6 D7 D8 D9 D10: library part LED_Green_0603_3V, "LED Green Vf= 3V If = 0.005A / IN-S63AT5G", Color=Green, Forward Current=5mA, Forward Voltage=3V, Package=0603, Supplier Part Number 1=1830-1062-1-ND, ComponentLink1Description=Datasheet, ComponentLink1URL=https://www.we-online.de/katalog/datasheet/150060GS75000.pdf, Made By="Robert Pafford", Supplier 1=Digi-Key
DNP1 DNP2 DNP3 DNP4: library part DNP_0402, "Do Not Populate 0402"
F1: "LittelFuse", Breaking Capacity=120A, Current Rating=45A, Mfr_Name="Littelfuse Inc", Package=Proprietary, Voltage Rating=85V, Created By="Flip B", Manufacturer_Part_Number=ITV9550L2045MR, Response Time=">1min for 2x45A"
F2: library part ERB-RE1R00V, "Pansonic", Breaking Capacity=150A, Current Rating=1A, Mfr_Name=Panasonic, Package=1206, Supplier Part Number 1=P15124CT-ND, Voltage Rating=32V, Created By="Nathan Ayer", Manufacturer_Part_Number=ERB-RE1R00V, Response Time="Fast Blow", Supplier 1=Digi-Key
J1: library part "CONN_MOLEX_MINIFIT JR_12POS_R/A", "Molex Minifit Jr. 5569  / 12 Pos R/A Natural", Color=Natural, Current Per Pin=13A, Manufacturer=Molex, Supplier Part Number 1=WM21356-ND, ComponentLink1Description=Datasheet, ComponentLink1URL=https://www.molex.com/pdm_docs/ps/PS-5556-001.pdf, Configuration="Right Angle", Created By="Flip B", Number of Positions=12, Pitch=4.2mm, Series="Minifit Jr 5569", Supplier 1=Digi-Key
J1R: library part TC2030_SWD, "TagConnect TC2030 ARM SWD 6-pin"
J2 J3 J4 J12: Current Rating="85 A", Created By="Nahtan Ayer", Screw Size=M4
J5: library part "CONN_MOLEX_MINIFIT JR_4POS_R/A", "Molex Minifit Jr. 5569  / 4 Pos R/A Natural", Color=Natural, Current Per Pin=13A, Manufacturer=Molex, Supplier Part Number 1=WM13112-ND, ComponentLink1Description=Datasheet, ComponentLink1URL=https://www.molex.com/pdm_docs/sd/026013115_sd.pdf, Configuration="Right Angle", Created By="Flip B", Number of Positions=4, Pitch=4.2mm, Series="Minifit Jr 5569", Supplier 1=Digi-Key
J6: library part CMP-17439-000023-1, "CONN HEADER R/A P6OS 2.5MM", Color=Natural, Current Rating=3A, Insulation Resistance=1GR, Max Operating Temperature=85°C, Min Operating Temperature=-25°C, Voltage Rating=250V, Contact Material=Brass, Contact Plating=Tin, Gender=Male, Lead Free="Lead Free", Material=Polyamide, Mount="Through Hole", Number of Positions=6, Number of Rows=1, Pitch=2.5mm, Termination=Crimp
J8: library part CONN_JST_XH254_3POS_VERT, "JST XH 2.54mm Pitch 3 Pos Vertical", Color=White, Current Per Pin=4A, Manufacturer=JST, ComponentLink1Description="Purchase Link", ComponentLink1URL=https://www.amazon.com/460PCS-XH2-54-Connector-Terminal-Connectors/dp/B09DBGVX5C, Configuration=Vertical, Created By="Robert P", NOTE="Do not use JST 2.5mm parts with this footprint. JST does not make 2.54mm pitch pins, rather only clones make this connector!", Number of Positions=3, Pitch=2.54mm, Series="XH 2.54"
J9: library part CMP-17439-000260-1, "CONN HEADER R/A 2POS 2.5MM", Flammability Rating="UL94 V-0", Insulation Color=Natural, Max Operating Temperature=85°C, Min Operating Temperature=-25°C, Voltage Rating=250V, Connector Type=Header, Contact Finish - Mating=TIN, Contact Material=Brass, Contact Shape=Square, Contact Type="Male Pin", Fastening Type=Detent, Insulation Material=Nylon, Lead Free="Lead Free", Mount="Through Hole", Number of Positions=2, Number of Rows=1, Packaging=Bulk, Series=XH, Termination=Press-Fit
J10: library part CMP-17439-000572-2, "CONN HEADER R/A 8POS 2MM", Color=Natural, Flammability Rating="UL94 V-0", Voltage Rating=250V, Connector Type=Header, Contact Finish - Mating=TIN, Contact Material="Copper Alloy", Contact Mating Length=0.114inch, Contact Plating=Tin, Contact Shape=Square, Contact Type="Male Pin", Fastening Type=Detent, Insulation Color=Natural, Insulation Material=Nylon, Lead Free="Lead Free", Mount="Through Hole", Number of Positions=8, Number of Rows=2, Packaging=Bulk, Pitch=2mm, Row Spacing=0.079inch, Series=PHD, Termination=Solder
J14: library part "CONN_MOLEX_MINIFIT JR_2POS_R/A", "Molex Minifit Jr. 5569  / 2 Pos R/A Natural", Color=Natural, Current Per Pin=13A, Manufacturer=Molex, Supplier Part Number 1=WM1351-ND, ComponentLink1Description=Datasheet, ComponentLink1URL=https://www.molex.com/pdm_docs/sd/026013115_sd.pdf, Configuration="Right Angle", Created By="Robert P", Number of Positions=2, Pitch=4.2mm, Series="Minifit Jr 5569", Supplier 1=Digi-Key
J16: library part CONN_MICROUSB, "Amphenol Micro USB-B / USB2.0 5 Pin Right Angle SMD", Color=Silver, Current Per Pin=1.8A, Manufacturer=Amphenol, Supplier Part Number 1=609-4613-1-ND, ComponentLink1Description=Datasheet, ComponentLink1URL=https://cdn.amphenol-icc.com/media/wysiwyg/files/documentation/datasheet/inputoutput/io_usb_micro.pdf?__cf_chl_jschl_tk__=05693735e19256298f6ef6ca2bb2e65c376a4f56-1625503833-0-Abitsb0-ufjOXJYs_S3J3r2iTn-nObalbmXUksF1VvO_h_WEmRdMlUD1I8-hmWSEVWzY1pirKnrPZWfgY3851qyBZe5ZvnNQePLGIzUgdEIQBVUyW36RsbYpDLEWxJ4horD-5gChFgobLYqwmG5aHl0E8lIn_twwPPrOxilK2gP0q9t_CNOs_u5fMqXvXUrlsOv8tIE2NRlu6NVP8qtkL2GjhlkeTUbDMF8WvvpPDTFOgvZ4Y16Ej8F8AhWos88mo5B1HssXozw0XrkJQIqERITUu6rqloz9kf4ZzhBHtDAt-IkiAFY_Ds9SW8FYKKTtINJVpHZQ6Gyu1FFM4Dc9MO0maE8_mmNcwlxqyRoRk_MPWW8VyByXWM5RSp52jteRKw7FeI9WIYvCbPAOy0Eyib-aseIQsnGbglBcUY6_2xp8GYaJM38H3dNvBPsSOfJBPndKedwKHllxjkucXn6xsN0sDXkpGN-cu8_2bDTJ0g-uUucKSCooYX-ApSDNGpkA_p9zv1SOAD8c0zaZVmtiBsN75QpVz2rzq9_BFxOywPvR, Configuration="Right Angle", Created By="Flip B", Number of Positions=5, Pitch=0.65mm, Series=10118192, Supplier 1=Digi-Key
J17: library part "CONN_MOLEX_MICROFIT_2 POS_R/A", "CONN HEADER R/A 2POS", Color=Black, Current Rating=8A, Manufacturer=Molex, Supplier Part Number 1=WM1813-ND, Configuration=R/A, Pitch=3mm, Supplier 1=Digikey
PS1 PS2: "Non-Isolated PoL Module DC DC Converter 1 Output 3.3 ~ 15V 20A 9V - 53V Input", Package="DIP-8 TDK-Lambda", Availability="In Stock", Check_prices=https://www.snapeda.com/parts/I6A4W020A033V-001-R/TDK-Lambda%20Americas%20Inc./view-part/1737324/?ref=eda, MF="TDK-Lambda Americas", MP=I6A4W020A033V-001-R, Price=None, Purchase-URL=https://pricing.snapeda.com/search/part/I6A4W020A033V-001-R/?ref=eda, SnapEDA_Link=https://www.snapeda.com/parts/I6A4W020A033V-001-R/TDK-Lambda%20Americas%20Inc./view-part/1737324/?ref=snap
Q1 Q2: library part PSMN4R4-80BS,118, "N-Channel 80V 100A (Ta) 306W (Ta), Surface Mount D2PAK", Amp Rating=100A, Package=D2PAK, Power Dissipation=306W, Supplier Part Number 1=1727-7123-1-ND, Created By="Flip B", FET Type=N-Channel, Manufacturer _Part_Number=PSMN4R4-80BS,118, Rds (on)="3.8mOhm @ 25A, 10Vgs", Supplier 1=Digi-Key, Vdss="80 V", Vendor="Nexperia USA Inc.", Vgs (Max)="+/- 20 V", Vgs (th)=3V
Q3 Q7: library part AO3404A, "N-Channel 30 V 5.8A (Ta) 1.4W (Ta) Surface Mount SOT-23-3", Amp Rating="5.8 A", Package=SOT23-3L, Power Dissipation="1.4W (Ta)", Supplier Part Number 1=785-1004-1-ND, Created By="Dylan T", FET Type=N-Channel, Manufacturer _Part_Number=AO3404A, Rds (on)="28mOhm @ 5.8A, 10V", SourceLibrary=ON_Semiconductor_2020-01-13, Supplier 1=Digi-Key, Vdss=30V, Vendor="Alpha & Omega Semiconductor Inc.", Vgs (Max)="3V @ 5.8A, 10V", Vgs (th)="3V @ 250µA"
Q4 Q10: "P-Channel 10.8A (Ta), 50A (Tc) 2.4W (Ta), 69W (Tc) Surface Mount D-PAK (TO-252AA)", Amp Rating="10.8 A", Package="D-PAK (TO-252AA)", Power Dissipation="2.4W (Ta), 69W (Tc)", Supplier Part Number 1=FDD4141CT-ND, Created By="Dylan T", FET Type="P-Channel, Power", Manufacturer_Part_Number=FDD4141, Rds (on)="12.3mOhm @ 12.7A, 10V", SourceLibrary=ON_Semiconductor_2020-01-13, Supplier 1=Digi-Key, Vdss="40 V", Vendor="ON Semiconductor", Vgs (Max)=±20V, Vgs (th)="3V @ 250µA"
Q5: library part TSM500P02CX, "P-Channel 20 V 4.7A (Tc) 1.56W (Tc) Surface Mount SOT-23", Amp Rating="4.7 A", Package="TO-236-3, SC-59, SOT-23-3", Power Dissipation="1.56W (Tc)", Supplier Part Number 1=TSM500P02CXRFGCT-ND, Created By="Robert Pafford", FET Type=P-Channel, Manufacturer_Part_Number=TSM500P02CX, Rds (on)="50mOhm @ 3A, 4.5V", Supplier 1=Digi-Key, Vdss="20 V", Vendor="Taiwan Semiconductor Corporation", Vgs (Max)=±10V, Vgs (th)="800mV @ 250µA"
Q8 Q9: "P-Channel 30 V 60A (Tc) 65.8W (Tc) Surface Mount PowerPAK® SO-8", Mfr_Name=Vishay, Supplier Part Number 1=78-SIR167DP-T1-GE3, Copyright="Copyright (C) 2022 Ultra Librarian. All rights reserved.", Manufacturer_Part_Number=SIR167DP-T1-GE3, RefDes=RefDes, Supplier 1=Mouser, Type=DEV
Q12 U6: "N-Channel 30 V 5.8A (Ta) 1.4W (Ta) Surface Mount SOT-23-3", Amp Rating="5.8 A", Package=SOT23-3L, Power Dissipation="1.4W (Ta)", Supplier Part Number 1=785-1004-1-ND, Created By="Dylan T", FET Type=N-Channel, Manufacturer _Part_Number=AO3404A, Rds (on)="28mOhm @ 5.8A, 10V", SourceLibrary=ON_Semiconductor_2020-01-13, Supplier 1=Digi-Key, Vdss=30V, Vendor="Alpha & Omega Semiconductor Inc.", Vgs (Max)="3V @ 5.8A, 10V", Vgs (th)="3V @ 250µA"
R1 R2 R3 R27: library part RESISTOR_1M_0603, "RES 1M OHM 1/8W 0603", Digikey Part Numer=CR0603-JW-104ELFTR-ND, Supplier Part Number 1=RMCF0603JT1M00CT-ND, Tolerance="+/- 5%", ComponentLink1Description=Datasheet, ComponentLink1URL=https://www.bourns.com/docs/product-datasheets/CRxxxxx.pdf, Made By="Robert Pafford", Supplier=Digikey, Supplier 1=Digi-Key, Value  (Ohms)=1M, Wattage=1/8W
R1C R4C R4R R5R R6C R8 R28: library part RESISTOR_10K_0402, "RES 10k OHM 1% 1/16W 0402", Digikey Part Numer=CR0603-JW-104ELFTR-ND, Supplier Part Number 1=YAG3436CT-ND, Tolerance="+/- 1%", Value  (Ohms)=10K, Made By="Robert Pafford", Supplier=Digikey, Supplier 1=Digi-Key, Wattage=1/16W
R1R R5 R6R R7 R7R R45: library part RESISTOR_1K_0402, "RES 1k OHM 1% 1/16W 0402", Digikey Part Numer=CR0603-JW-104ELFTR-ND, Supplier Part Number 1=13-AC0402FR-131KLCT-ND, Tolerance="+/- 1%", Value  (Ohms)=1K, Made By="Robert Pafford", Supplier=Digikey, Supplier 1=Digi-Key, Wattage=1/16W
R2C R3C: library part RESISTOR_60.4_0402, "RES 60.4 OHM 1% 1/16W 0402", Digikey Part Numer=CR0603-JW-104ELFTR-ND, Supplier Part Number 1=13-AC0402FR-0760R4LCT-ND, Tolerance="+/- 1%", Value  (Ohms)=60.4, Made By="Robert Pafford", Supplier=Digikey, Supplier 1=Digi-Key, Wattage=1/16W
R2R R3R: library part RESISTOR_27_0402, "RES 27 OHM 1% 1/16W 0402", Digikey Part Numer=CR0603-JW-104ELFTR-ND, Supplier Part Number 1=YAG5278DKR-ND, Tolerance="+/- 1%", Value  (Ohms)=27, Made By="Robert Pafford", Supplier=Digikey, Supplier 1=Digi-Key, Wattage=1/16W
R4 R6 R9 R10 R11 R12 R13 R15 R24 R26: library part RESISTOR_100_0402, "RES 100 OHM 5% 1/16W 0402", Digikey Part Numer=311-100JRTR-ND, Supplier Part Number 1=311-100JRCT-ND, Tolerance="+/- 5%", Value  (Ohms)=100, Made By="Flip B", Supplier=Digikey, Supplier 1=Digi-Key, Wattage=1/16W
R5C: library part RESISTOR_604_0402, "RES 604 OHM 1% 1/16W 0402", Digikey Part Numer=CR0603-JW-104ELFTR-ND, Supplier Part Number 1=13-AC0402FR-07604RLCT-ND, Tolerance="+/- 1%", Value  (Ohms)=604, Made By="Robert Pafford", Supplier=Digikey, Supplier 1=Digi-Key, Wattage=1/16W
R7C R8C: library part RESISTOR_200_0402, "RES 200 OHM 1% 1/16W 0402", Digikey Part Numer=CR0603-JW-104ELFTR-ND, Supplier Part Number 1=YAG3453CT-ND, Tolerance="+/- 1%", Value  (Ohms)=200, Made By="Robert Pafford", Supplier=Digikey, Supplier 1=Digi-Key, Wattage=1/16W
R14 R16: library part RESISTOR_27_0603, "RES 27 OHM 5% 1/8W 0603", Digikey Part Numer=CR0603-JW-104ELFTR-ND, Supplier Part Number 1=2019-RK73B1JTTD270JCT-ND, Tolerance="+/- 5%", Value  (Ohms)=27, ComponentLink1Description=Datasheet, ComponentLink1URL=https://www.bourns.com/docs/product-datasheets/CRxxxxx.pdf, Made By="Robert Pafford", Supplier=Digikey, Supplier 1=Digi-Key, Wattage=1/8W
R17 R25 R36 R37 R43: library part RESISTOR_10K_0603, "RES 10k OHM 5% 1/10W 0603", Digikey Part Numer=CR0603-JW-104ELFTR-ND, Supplier Part Number 1=2019-RK73B1JTTD103JCT-ND, Tolerance="+/- 5%", Value  (Ohms)=10K, ComponentLink1Description=Datasheet, ComponentLink1URL=https://www.bourns.com/docs/product-datasheets/CRxxxxx.pdf, Made By="Robert Pafford", Supplier=Digikey, Supplier 1=Digi-Key, Wattage=1/8W
R18 R29 R34 R42 R49: library part RESISTOR_1K_0603, "RES 1k OHM 5% 1/8W 0603", Digikey Part Numer=CR0603-JW-104ELFTR-ND, Supplier Part Number 1=2019-RK73B1JTTD102JCT-ND, Tolerance="+/- 5%", Value  (Ohms)=1K, ComponentLink1Description=Datasheet, ComponentLink1URL=https://www.bourns.com/docs/product-datasheets/CRxxxxx.pdf, Made By="Robert Pafford", Supplier=Digikey, Supplier 1=Digi-Key, Wattage=1/8W
R19: library part RESISTOR_2.1K_0603, "RES 2.1k OHM 5% 1/8W 0603", Digikey Part Numer=CR0603-JW-104ELFTR-ND, Supplier Part Number 1=YAG1852CT-ND, Tolerance="+/- 5%", Value  (Ohms)=2.1K, ComponentLink1Description=Datasheet, ComponentLink1URL=https://www.bourns.com/docs/product-datasheets/CRxxxxx.pdf, Made By="Robert Pafford", Supplier=Digikey, Supplier 1=Digi-Key, Wattage=1/8W
R20: library part RESISTOR_1m_CS, "RES 1m OHM 1% 8W Current Sense", Supplier Part Number 1=CSS2H-3920R-1L00FCT-ND, Tolerance="+/- 1%", Value  (Ohms)=1m, ComponentLink1Description=Datasheet, ComponentLink1URL=https://www.bourns.com/docs/product-datasheets/css2h-3920.pdf, Made By="Flip B", Supplier 1=Digi-Key, Wattage=8W
R21 R22 R23: library part RESISTOR_20K_0402, "RES 20k OHM 1% 1/16W 0402", Supplier Part Number 1=311-20.0KLRCT-ND, Tolerance="+/- 1%", Value  (Ohms)=20k, Made By="Flip B", Supplier 1=Digi-Key, Wattage=1/16W
R30: library part CMP-2000-03938-1, "RC0603FR-071K82L", Manufacturer=Yageo, Part Number=RC0603FR-071K82L
R31: library part RESISTOR_8.56K_1%_0402, "8.56 kOhms ±1% 0.063W, 1/16W Chip Resistor 0402 (1005 Metric) Automotive AEC-Q200, Moisture Resistant Metal Film", Supplier Part Number 1=2019-RN73H1ETTP8561F50CT-ND, Tolerance="+/- 1%", Value (Ohms)=8.56K, Made By="John Ulm", Supplier 1=Digi-Key, Wattage=1/16W
R32 R33 R41: library part RESISTOR_4.7K_0603, "RES 4.7k OHM 5% 1/10W 0603", Digikey Part Numer=CR0603-JW-104ELFTR-ND, Supplier Part Number 1=RMCF0603JT4K70CT-ND, Tolerance="+/- 5%", Value  (Ohms)=4.7K, Made By="Robert Pafford", Supplier=Digikey, Supplier 1=Digi-Key, Wattage=1/10W
R35 R48: library part RESISTOR_100K_0.5%_0603, "RES 100k OHM 0.5% 1/10W 0603", Digikey Part Numer=CR0603-JW-104ELFTR-ND, Supplier Part Number 1=311-2395-1-ND, Tolerance="+/- 0.5%", Value  (Ohms)=100K, ComponentLink1Description=Datasheet, ComponentLink1URL=https://www.bourns.com/docs/product-datasheets/CRxxxxx.pdf, Made By="John Ulm", Supplier=Digikey, Supplier 1=Digi-Key, Wattage=1/10W
R38: library part RESISTOR_100K_0603, "RES 100k OHM 5% 1/10W 0603", Digikey Part Numer=CR0603-JW-104ELFTR-ND, Supplier Part Number 1=CR0603-JW-104ELFCT-ND, Tolerance="+/- 5%", Value  (Ohms)=100K, ComponentLink1Description=Datasheet, ComponentLink1URL=https://www.bourns.com/docs/product-datasheets/CRxxxxx.pdf, Made By="Flip B", Supplier=Digikey, Supplier 1=Digi-Key, Wattage=1/10W
R39: library part ERA-3AEB512V_2, "5.1 kOhms ±0.1% 0.1W, 1/10W Chip Resistor 0603 (1608 Metric) Automotive AEC-Q200 Thin Film", Manufacturer_Part_Number=ERA-3AEB512V, Mfr_Name=Panasonic, Copyright="Copyright (C) 2023 Ultra Librarian. All rights reserved.", RefDes=RefDes, Type=DEV
R40 R44 R46: library part RESISTOR_3.9K_0603, "RES 3.9k OHM 1% 1/10W 0603", Supplier Part Number 1=P3.90KHCT-ND, Tolerance="+/- 1%", Value  (Ohms)=3.9K, Made By="Robert Pafford", Supplier 1=Digi-Key, Wattage=1/10W
R50 R51 R52 R53 R57: library part RESISTOR_10K_0.5%_0603, "RES 10k OHM 0.5% 1/10W 0603", Digikey Part Numer=CR0603-JW-104ELFTR-ND, Supplier Part Number 1=749-1695-1-ND, Tolerance="+/- 0.5%", Value  (Ohms)=10K, Made By="Robert Pafford", Supplier=Digikey, Supplier 1=Digi-Key, Wattage=1/10W
R54 R55 R56: library part RESISTOR_1K_0.5%_0603, "RES 1k OHM 0.5% 1/10W 0603", Digikey Part Numer=CR0603-JW-104ELFTR-ND, Supplier Part Number 1=749-1693-1-ND, Tolerance="+/- 0.5%", Value  (Ohms)=1K, Made By="Robert Pafford", Supplier=Digikey, Supplier 1=Digi-Key, Wattage=1/10W
SB1 SB2 SB3: library part JUMPER_0_0603, "0 Ohm Jumper No Fit for Solder Bridge", Value  (Ohms)=0, ComponentLink1Description=Digikey, ComponentLink1URL=https://www.digikey.com/en/products/detail/koa-speer-electronics-inc/RK73B1JTTD101J/9844701, Made By="Robert Pafford"
SW1C: library part CAS-220TA_CAN_TERM, "GOLD SWITCH FLUSH SLIDE DPDT 100MA 6V", Current Rating="100 mA", Supplier Part Number 1=CAS220JCT-ND, Voltage Rating=6VDC, Contact Finish=Gold, Made By="Robert Pafford", Supplier 1=Digi-Key, Switch Function=DPDT
SW1R SW2R: library part "Tactile Switch SMD", "WS-TASV J-Bend SMT Tact Switch, SPST-NO, 16VDC, 50mA, 260g", Manufacturer="Wurth Elektronik", Operating Temperature Max=85°C, Operating Temperature Min=-40°C, Rated Current=50mA, Rated Voltage=16VDC, Category="Tact Switches", Circuit=SPST-NO, ComponentLink1Description="Website Link", ComponentLink1URL=https://www.we-online.com/redexpert/article/434123025826?ad, ComponentLink2Description="Datasheet Link", ComponentLink2URL=https://www.we-online.com/redexpert/spec/434123025826?ad, Contact Material="Stainless Steel", Contact Plating=Silver, Height=2.5mm, Length=4.2mm, Manufacturer Part Number=434123025826, Match Code=WS-TASV, Mount="Surface Mount", Operation Force=260g, Packaging="Tape and Reel", Terminal Material="Copper Alloy", Terminal Plating=Silver, Washable=No, Width=3.2mm